# Altium PCB HVSG.PcbDoc
Units mm, origin at the board's own origin, x right, y up, seen from the top; angles counter-clockwise.
Board outline 169.29 x 39.62 mm, 2 copper layers (Top Layer, Bottom Layer), stack 1.671 mm thick; 30 components, 44 nets, 136 pads, 59 vias.
Unrouted connection lines stored in the file: 1.
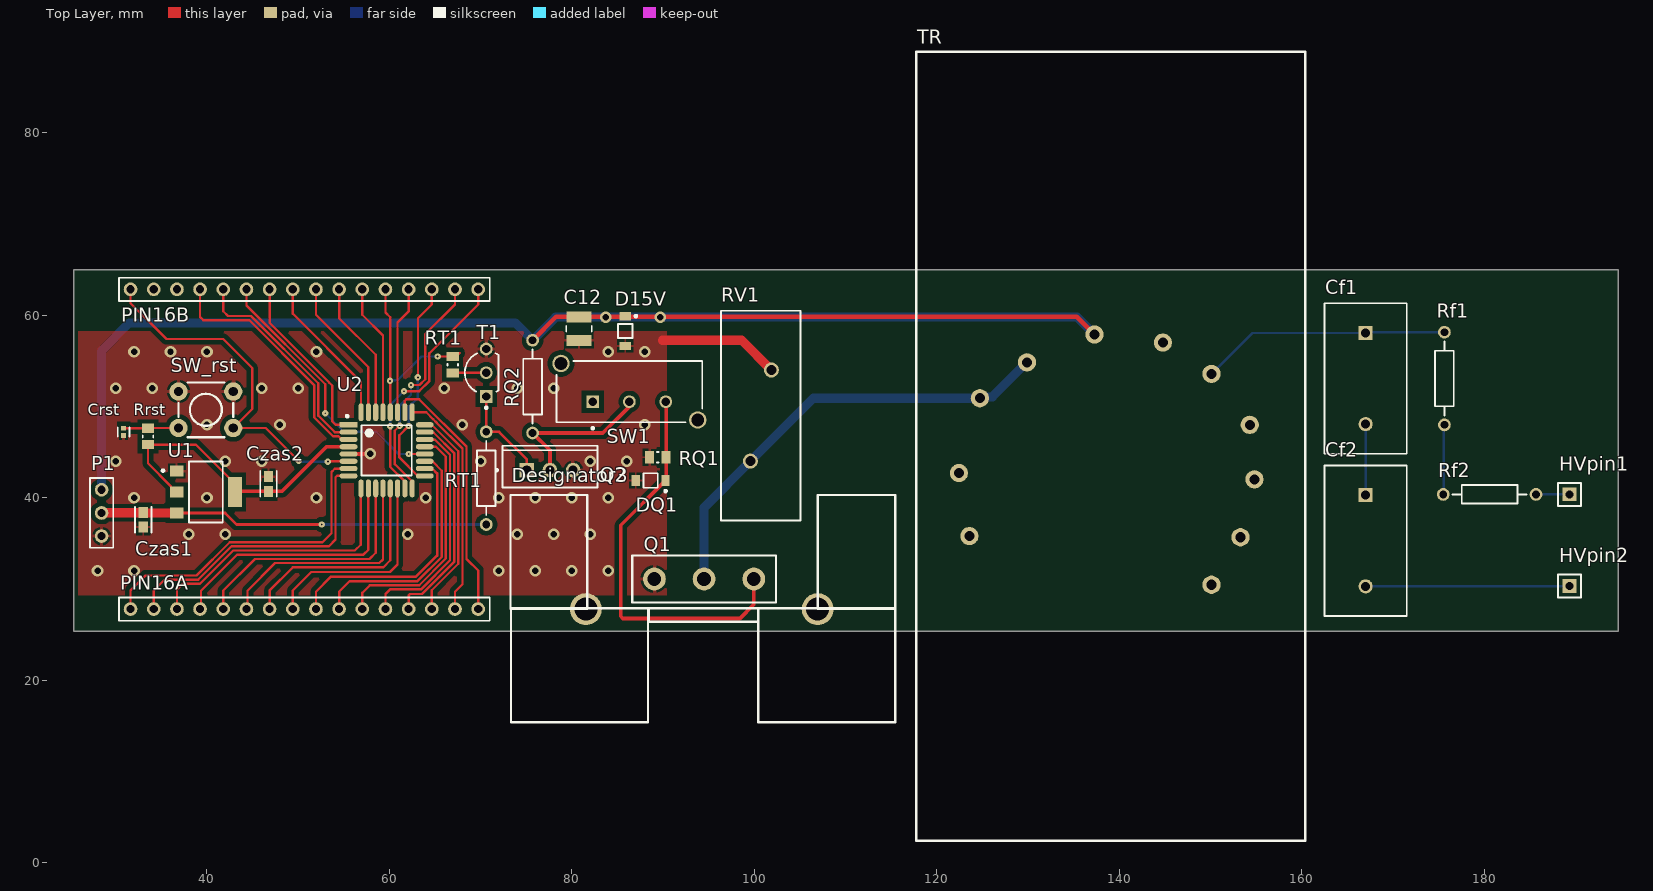
[diagram p0: Top Layer view]
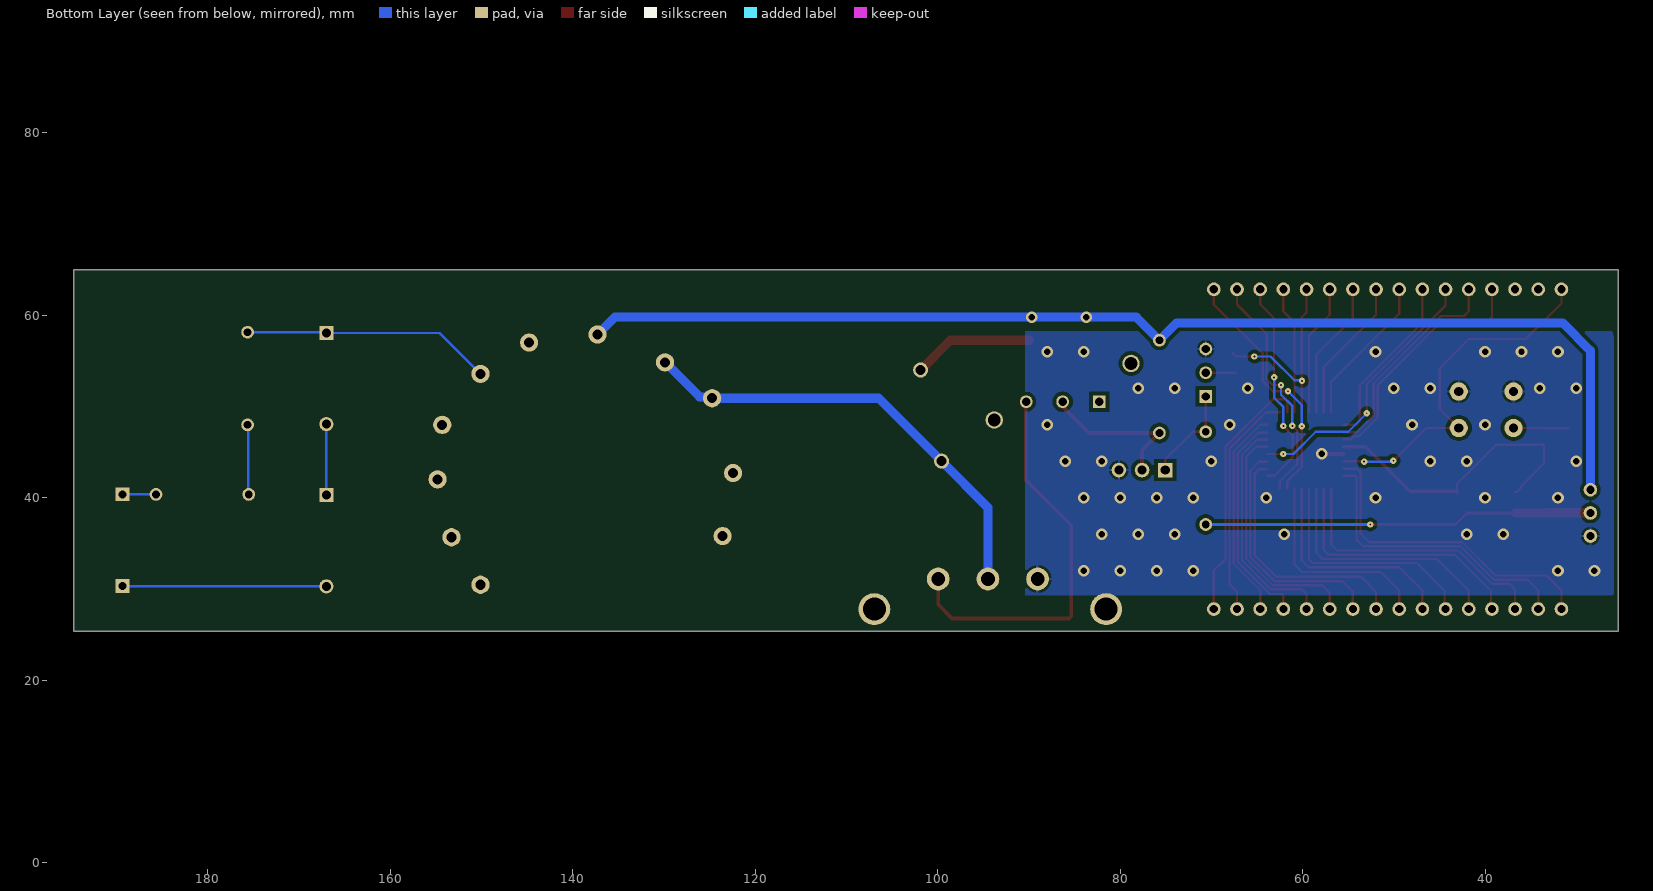
[diagram p1: Bottom Layer view, seen from below]
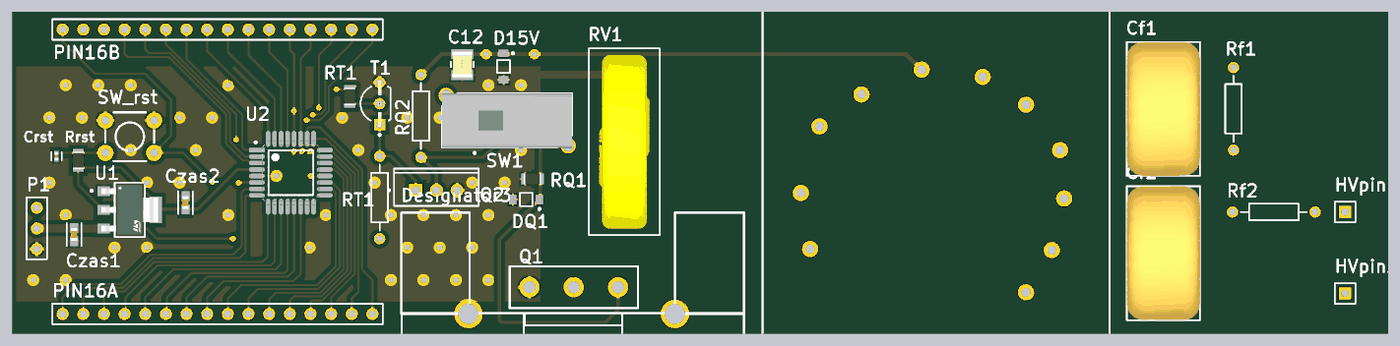
[diagram p2: 3D render of the assembled board from above, using the file's embedded part models]

## Layer stack, top to bottom
Top Solder: solder mask 0.0102, Solder Resist, Dk 3.5
Top Layer: signal copper 0.0356
Dielectric 1: dielectric 1.6, FR-4, Dk 4.8
Bottom Layer: signal copper 0.0356
Bottom Solder: solder mask 0.0102, Solder Resist, Dk 3.5

## Board outline
25.4,25.4 194.691,25.4 194.691,65.024 25.4,65.024

## Design rules (kind name [scope] priority, off if disabled: settings)
Clearance Clearance_3 [InNamedPolygon('GND_L02_P000')] p1: gap=0.4 ignorepadtopadclearanceinfootprint=FALSE
Clearance Clearance_2 [InNamedPolygon('GND_L01_P001')] p2: gap=0.5 ignorepadtopadclearanceinfootprint=FALSE
Clearance Clearance_1 [InNamedPolygon('GND_L01_P001')] p3: gap=0.5 ignorepadtopadclearanceinfootprint=FALSE
Clearance [All] p4: gap=0.2 ignorepadtopadclearanceinfootprint=FALSE
Height [All] p1: minheight=0 maxheight=50 prefheight=12.7
PolygonConnect PolygonConnect_7 [All vs IsNamedPolygon('GND_L01_P001')] p1: thpad.connectstyle=Relief thpad.reliefconductorwidth=0.4 thpad.reliefentries=4 thpad.polygonreliefangle="90 Angle" thpad.airgapwidth=0.254 smdpad.connectstyle=Relief smdpad.reliefconductorwidth=0.254 smdpad.reliefentries=4 smdpad.polygonreliefangle="90 Angle" smdpad.airgapwidth=0.254 via.connectstyle=Direct via.reliefconductorwidth=0.254 via.reliefentries=4 via.polygonreliefangle="90 Angle" via.airgapwidth=0.254
PolygonConnect PolygonConnect_6 [All vs IsNamedPolygon('GND_L01_P001')] p2: thpad.connectstyle=Relief thpad.reliefconductorwidth=0.4 thpad.reliefentries=4 thpad.polygonreliefangle="90 Angle" thpad.airgapwidth=0.254 smdpad.connectstyle=Relief smdpad.reliefconductorwidth=0.254 smdpad.reliefentries=4 smdpad.polygonreliefangle="90 Angle" smdpad.airgapwidth=0.254 via.connectstyle=Relief via.reliefconductorwidth=0.254 via.reliefentries=4 via.polygonreliefangle="90 Angle" via.airgapwidth=0.254
PolygonConnect PolygonConnect_5 [All vs IsNamedPolygon('GND_L02_P000')] p3: thpad.connectstyle=Relief thpad.reliefconductorwidth=0.254 thpad.reliefentries=4 thpad.polygonreliefangle="90 Angle" thpad.airgapwidth=0.254 smdpad.connectstyle=Relief smdpad.reliefconductorwidth=0.254 smdpad.reliefentries=4 smdpad.polygonreliefangle="90 Angle" smdpad.airgapwidth=0.254 via.connectstyle=Direct via.reliefconductorwidth=0.254 via.reliefentries=4 via.polygonreliefangle="90 Angle" via.airgapwidth=0.254
PolygonConnect PolygonConnect_4 [All vs IsNamedPolygon('GND_L01_P001')] p4: thpad.connectstyle=Relief thpad.reliefconductorwidth=0.254 thpad.reliefentries=4 thpad.polygonreliefangle="90 Angle" thpad.airgapwidth=0.254 smdpad.connectstyle=Relief smdpad.reliefconductorwidth=0.254 smdpad.reliefentries=4 smdpad.polygonreliefangle="90 Angle" smdpad.airgapwidth=0.254 via.connectstyle=Direct via.reliefconductorwidth=0.254 via.reliefentries=4 via.polygonreliefangle="90 Angle" via.airgapwidth=0.254
PolygonConnect PolygonConnect_3 [All vs IsNamedPolygon('GND_L01_P001')] p5: thpad.connectstyle=Relief thpad.reliefconductorwidth=0.254 thpad.reliefentries=4 thpad.polygonreliefangle="90 Angle" thpad.airgapwidth=0.254 smdpad.connectstyle=Direct smdpad.reliefconductorwidth=0.254 smdpad.reliefentries=4 smdpad.polygonreliefangle="90 Angle" smdpad.airgapwidth=0.254 via.connectstyle=Relief via.reliefconductorwidth=0.254 via.reliefentries=4 via.polygonreliefangle="90 Angle" via.airgapwidth=0.254
PolygonConnect PolygonConnect_2 [All vs IsNamedPolygon('GND_L01_P001')] p6: thpad.connectstyle=Relief thpad.reliefconductorwidth=0.254 thpad.reliefentries=4 thpad.polygonreliefangle="90 Angle" thpad.airgapwidth=0.254 smdpad.connectstyle=Relief smdpad.reliefconductorwidth=0.254 smdpad.reliefentries=4 smdpad.polygonreliefangle="90 Angle" smdpad.airgapwidth=0.254 via.connectstyle=Direct via.reliefconductorwidth=0.254 via.reliefentries=4 via.polygonreliefangle="90 Angle" via.airgapwidth=0.254
PolygonConnect PolygonConnect_1 [All vs IsNamedPolygon('GND_L01_P001')] p7: thpad.connectstyle=Relief thpad.reliefconductorwidth=0.254 thpad.reliefentries=4 thpad.polygonreliefangle="90 Angle" thpad.airgapwidth=0.254 smdpad.connectstyle=Relief smdpad.reliefconductorwidth=0.254 smdpad.reliefentries=4 smdpad.polygonreliefangle="90 Angle" smdpad.airgapwidth=0.254 via.connectstyle=Direct via.reliefconductorwidth=0.254 via.reliefentries=4 via.polygonreliefangle="90 Angle" via.airgapwidth=0.254
PolygonConnect [All] p8: connectstyle=Relief reliefconductorwidth=0.254 reliefentries=4 polygonreliefangle="90 Angle" airgapwidth=0.254
RoutingVias [All] p1: holewidth=0.711 width=1.27 viastyle="Through Hole" minholewidth=0.711 minwidth=1.27 maxholewidth=2 maxwidth=4
SolderMaskExpansion [All] p1: expansion=0.102 istentingtop=FALSE
SupplyNets "Schematic Supply Nets_1" [InNet('GND')] p1: voltage=0.000
SupplyNets "Schematic Supply Nets" [InNet('GND2')] p2: voltage=0.000
Width "Schematic Width Constraint_5" [InNet('NetQ1_2')] p1: maxlimit=1 minlimit=0.254 preferedwidth=0.254
Width "Schematic Width Constraint_3" [InNet('5V')] p2: maxlimit=1 minlimit=0.254 preferedwidth=1 bottomlayer_prefwidth=0.254 minimp=50.000000 maximp=50.000000 favimp=50.000000
Width "Schematic Width Constraint_2" [InNet('GND')] p3: maxlimit=2 minlimit=0.254 preferedwidth=0.254 minimp=50.000000 maximp=50.000000 favimp=50.000000
Width "Schematic Width Constraint_1" [InNet('12V')] p4: maxlimit=1 minlimit=0.254 preferedwidth=0.254
Width "Schematic Width Constraint" [InNet('3V')] p5: maxlimit=0.5 minlimit=0.254 preferedwidth=0.254 bottomlayer_maxwidth=0.254 minimp=50.000000 maximp=50.000000 favimp=50.000000
Width [All] p6: maxlimit=0.41 minlimit=0.254 preferedwidth=0.254
29 further rules are at their usual default settings.

## Classes and differential pairs
component class Sheet1: C12 Cf1 Cf2 Crst Czas1 Czas2 D15V DQ1 HVpin1 HVpin2 p1 PIN16A PIN16B Q1 Q2 Rf1 Rf2 RQ1 RQ2 Rrst RT1 RV1 SW1 SW_rst T1 TR U1 U2

## Components (designator, comment, footprint, x,y, rotation, side; value= is the part's Value field where it differs from the comment)
C12 "C1210C107M4PACTU" FP-C1210C-FS-MFG 80.772,58.547 r270 top
Cf1 "ECKD4A102MDU" FP-ECKD4A102MDU-MFG 167.005,53.086 r270 top
Cf2 "ECKD4A102MDU" FP-ECKD4A102MDU-MFG 167.005,35.306 r270 top
Crst "C0402C104K8PACTU" FP-C0402-BB-MFG 30.861,47.244 r270 top value="0.10 μF"
Czas1 "GRM188R60J106ME47D" FP-GRM188-0_1-e0_2_0_55-IPC_A 33.02,37.592 r270 top (schematic designator Czas?)
Czas2 "GRM188R60J106ME47D" FP-GRM188-0_1-e0_2_0_55-IPC_A 46.736,41.529 r90 top
D15V "MMSZ4702T1G" ONSC-SOD-123-2-425-04_V 85.852,58.293 r270 top
Designator3 "Comment" heatsink 106.934,27.813 r180 top
DQ1 "MMSZ4702T1G" ONSC-SOD-123-2-425-04_V 88.63,41.91 r180 top
HVpin1 "GOLDPIN_1" HDR1X1 189.357,40.386 r90 top
HVpin2 "GOLDPIN_1" HDR1X1 189.357,30.353 r90 top
P1 "pin3" pin3 28.448,38.354 r270 top (schematic designator p1)
PIN16A "pin16" pin16 51.943,27.813 r0 top
PIN16B "pin16" pin16 51.943,62.865 r0 top
Q1 "NMOS_STW11NM80" "NMOS_ STW11NM80" 94.488,31.115 r180 top
Q2 "IPP045N10N3 G" INF-PG-TO220-3-1_A_V 77.597,43.053 r90 top
Rf1 "RES_AX_1/4W_4M" AX_1/4W_4M 175.641,48.006 r90 top value=1M
Rf2 "RES_AX_1/4W_4M" AX_1/4W_4M 185.674,40.386 r180 top value=1M
RQ1 "100k" RESC2013X60X35NL10T20 89.419,44.45 r180 top (schematic designator RQ?)
RQ2 "RES_AX_1/4W_4M" AX_1/4W_4M 75.692,47.117 r90 top value=1K
Rrst "10k" RESC2013X60X35NL10T20 33.528,46.736 r270 top
RT1 "RES_AX_1/4W_4M" AX_1/4W_4M 70.612,47.244 r270 top value=1K
RT1 "10k" RESC2013X60X35NL10T20 66.929,54.61 r90 top (schematic designator Rster)
RV1 "820524211B" D23W8.7H27P2.3 100.711,49.022 r270 top
SW1 "1825255-1" TECO-1825255-1_V 86.296,51.646 r0 top
SW_rst "SWITCH_SQ_6m_4X6m" SQ_6m_4X6m 39.878,49.657 r270 top
T1 "BC548" TO-92W 70.612,51.121 r90 top
TR "trafopowielacz" trafopowielacz 123.571,35.814 r0 top
U1 "LD1117S33CTR" FP-SOT-223-0046067_14-MFG 39.878,40.64 r0 top
U2 "STM32G030K8T6" FP-LQFP32-5V-IPC_A 59.69,45.212 r0 top

## Footprints (in the part's own frame and the unit in brackets; to place one, negate y for a bottom-side part, rotate by r counter-clockwise, add the part's x,y. Pads: shape width x height; smd on the part's side, far side on the other; paste and mask are expansions set on the pad)
AX_1/4W_4M [mm] "Axial Device, Thru-Hole; 2 Leads; 0.4 in Pin Spacing"
  round 1.4 hole 0.85: 1(0,0) 2(10.16,0)
  silkscreen extent 1.02,-1.02 9.14,1.02
D23W8.7H27P2.3 [mm] "Disk Varistor, Diameter 23mm, Width 8.7mm"
  round 1.65 hole 1.1: 1(-5,1.15) 2(5,-1.15)
  silkscreen extent -11.5,-4.35 11.5,4.35, body extent -10.69,-3.1 10.69,3.1, height 24
FP-C0402-BB-MFG [mm]
  rect 0.52x0.52 smd paste+0 mask+0: 1(-0.4,0) 2(0.4,0)
  silkscreen extent -0.5,-0.64 0.5,0.64, body extent -0.8,-0.4 0.8,0.4, height 0.25
FP-C1210C-FS-MFG [mm]
  rect 1.2x2.7 smd paste+0 mask+0: 1(-1.3,0) 2(1.3,0)
  silkscreen extent -0.33,-1.4 0.33,1.4, body extent -2,-1.5 2,1.5, height 0.25
FP-ECKD4A102MDU-MFG [mm]
  rect 1.55x1.55 hole 1 paste-2539.97 mask+0: 1(-5,0)
  round 1.55 hole 1 paste-2539.97 mask+0: 2(5,0)
  silkscreen extent -8.25,-4.5 8.25,4.5, body extent -8.35,-4.6 8.35,4.6, height 0.25
FP-GRM188-0_1-e0_2_0_55-IPC_A [mm]
  rect 1.208x1.012 smd paste+0 mask+0: 1(-0.802,0) 2(0.802,0)
  silkscreen extent -1.41,-0.91 1.41,0.91, body extent -1.91,-1.01 1.91,1.01, height 0.25
FP-LQFP32-5V-IPC_A [mm]
  rect 1.955x0.566 smd paste+0 mask+0: 1(-4.175,2.8)
  rrect100% 1.955x0.566 smd paste+0 mask+0: 2(-4.175,2) 3(-4.175,1.2) 4(-4.175,0.4) 5(-4.175,-0.4) 6(-4.175,-1.2) 7(-4.175,-2) 8(-4.175,-2.8) 17(4.175,-2.8) 18(4.175,-2) 19(4.175,-1.2) 20(4.175,-0.4) 21(4.175,0.4) 22(4.175,1.2) 23(4.175,2) 24(4.175,2.8)
  rrect100% 0.566x1.955 smd paste+0 mask+0: 9(-2.8,-4.175) 10(-2,-4.175) 11(-1.2,-4.175) 12(-0.4,-4.175) 13(0.4,-4.175) 14(1.2,-4.175) 15(2,-4.175) 16(2.8,-4.175) 25(2.8,4.175) 26(2,4.175) 27(1.2,4.175) 28(0.4,4.175) 29(-0.4,4.175) 30(-1.2,4.175) 31(-2,4.175) 32(-2.8,4.175)
  silkscreen extent -4.45,-2.75 2.75,3.87, body extent -5.65,-5.65 5.65,5.65, height 0.25
FP-SOT-223-0046067_14-MFG [mm]
  rect 1.5x1.2 smd paste+0 mask+0: 1(-3.2,2.3) 2(-3.2,0) 3(-3.2,-2.3)
  rect 1.5x3.3 smd paste+0 mask+0: 4(3.2,0)
  silkscreen extent -4.82,-3.35 1.85,3.35, body extent -4.05,-3.45 4.05,3.45, height 0.25
HDR1X1 [mm] "Connector; Header; 1Position"
  rect 1.5x1.5 hole 0.9: 1(0,0)
  silkscreen extent -1.27,-1.27 1.25,1.27
heatsink [mm]
  round 3.5 hole 2.5: 0(0,0) 1(25.4,0)
  silkscreen extent -8.5,-12.5 33.66,12.4
INF-PG-TO220-3-1_A_V [mm] "FM, 3-Leads, Body 10.03x8.98mm, Pitch 2.54mm"
  rect 1.6x1.6 hole 1: 1(0,2.54)
  round 1.6 hole 1: 2(0,0) 3(0,-2.54)
  silkscreen extent -1.93,-5.2 2.67,5.97, body extent -1.93,-5.2 2.67,5.2, height 20.75
"NMOS_ STW11NM80" [mm]
  round 2.5 hole 1.5: 1(-5.45,0) 2(0,0) 3(5.45,0)
  silkscreen extent -7.87,-2.57 7.88,2.58
ONSC-SOD-123-2-425-04_V [mm] "SOD, 2-Leads, Body 2.69x1.6mm"
  rect 0.91x1.22 smd: 1(-1.635,0) 2(1.635,0)
  silkscreen extent -1.76,-0.8 0.78,1.29, body extent -1.35,-0.8 1.35,0.8, height 1.35
pin3 [mm]
  round 1.5 hole 0.9: 0(-2.54,0) 1(0,0) 2(2.54,0)
  silkscreen extent -3.81,-1.27 3.81,1.27
pin16 [mm]
  round 1.5 hole 0.9: 0(-20.32,0) 1(-17.78,0) 2(-15.24,0) 3(-12.7,0) 4(-10.16,0) 5(-7.62,0) 6(-5.08,0) 7(-2.54,0) 8(0,0) 9(2.54,0) 10(5.08,0) 11(7.62,0) 12(10.16,0) 13(12.7,0) 14(15.24,0) 15(17.78,0)
  silkscreen extent -21.59,-1.27 19.05,1.27
RESC2013X60X35NL10T20 [mm] "Chip Resistor, 2-Leads, Body 2.1x1.35mm, IPC Medium Density"
  rect 1x1.35 smd: 1(-0.9,0) 2(0.9,0)
  silkscreen extent -0.1,-0.58 0.1,0.58, body extent -1.05,-0.68 1.05,0.67, height 0.6
SQ_6m_4X6m [mm]
  round 2 hole 1 paste-2539.97: 1(-2,3) 2(-2,-3) 3(2,-3) 4(2,3)
  silkscreen extent -3,-3 3,3
TECO-1825255-1_V [mm] "THD, 5-Leads, Body 6.7x16mm, Pitch 4mm"
  rect 1.4x1.4 hole 0.9: 1(-4,-1.1)
  round 1.4 hole 0.9: 2(0,-1.1) 3(4,-1.1)
  round 1.9 hole 1.4: MH1(-7.5,3.1) MH2(7.5,-3.1)
  silkscreen extent -8,-4.12 8,3.35, body extent -8,-3.35 8,3.35, height 12
TO-92W [mm] "TO, 3-Leads, Body Dia 4.7mm, Pitch 2.6mm"
  rect 1.4x1.4 hole 0.9: 1(0,0)
  round 1.4 hole 0.9: 2(2.6,0) 3(5.2,0)
  silkscreen extent -1.37,-1.34 4.73,2.35, body extent -0.24,-1.34 5.44,2.35, height 5.33
trafopowielacz [mm] "Sony Focus HDK 765-51 IB2655"
  round 2 hole 1.1: 1(0,0) 2(-1.148,6.909) 3(1.143,15.113) 4(6.309,19.047) 5(13.716,22.098) 6(21.21,21.21) 7(26.543,17.78) 8(30.734,12.192) 9(31.242,6.223) 10(29.718,-0.127) 11(26.543,-5.334)
  silkscreen extent -5.84,-33.4 36.83,53.09

## Part data
C12: library part CMP-03020-034653-1, "CAP CER 100UF 16V X5R 1210", Capacitance=100uF, Case Code (Imperial)=1210, Case Code (Metric)=3225, Dielectric=X5R, Dielectric Material=Ceramic, Max Operating Temperature=85°C, Min Operating Temperature=-55°C, Package Quantity=1000, Tolerance=20%, Voltage Rating=16V, Case/Package=1210, Depth=2.5mm, Lead Free="Lead Free", Length=3.2mm, Packaging="Tape and Reel", REACH SVHC="No SVHC", Termination=SMD/SMT, Thickness=0.106inch, Voltage Rating (DC)=16V, Weight=0.000564oz, Width=0.098inch
Cf1 Cf2: library part CMP-05432-000001-1, "High Voltage Ceramic Disc Capacitors, Rated 4 to 15 kVDC, Temp. Char. Y5T, 1.0NF 10000V", Capacitance=1nF, Case/Package=Radial, Dielectric=Y5T, Dielectric Material=Ceramic, Insulation Resistance=10GR, Max Operating Temperature=85°C, Min Operating Temperature=-25°C, Tolerance=20%, Voltage Rating=10kV, Lead Length=20mm, Lead Pitch=10mm, Reach SVHC Compliant=Yes, RoHS Compliant=Yes
Crst: library part CMP-2008-02046-2, "CAP CER 0.1UF 10V X5R 0402", Capacitance="0.10 μF", Manufacturer=Kemet, Package=C0402-BB, Temperature="-55°C to +125°C", Temperature Characteristic=X5R, Temperature Coefficient=15%, Temperature Range High=+125°C, Temperature Range Low=-55°C, Tolerance=0.1, Voltage Rating="10 V", Automotive=No, Category=Cap, ComponentLink2Description=Datasheet, ComponentLink2URL=https://content.kemet.com/datasheets/KEM_C1002_X7R_SMD.pdf, Device Class L1="Passive Components", Device Class L2=Capacitors, Device Class L3="Ceramic Capacitors", Digikey Description="CAP CER 0.1UF 10V X5R 0402", Height=0.55mm, Ipc Land Pattern Name=CAPC10050X50, Lead Free=Yes, Manufacturer Part Number=C0402C104K8PACTU, Material=Ceramic, Mouser Description="Capacitor 100 nF 10 VDC 0402", Octopart=https://octopart.com/c0402c104k8pactu-kemet-140039, RoHS=TRUE
Czas1 Czas2: library part CMP-2006-02792-2, "Chip Multilayer Ceramic Capacitors for General Purpose, 0603, 10uF, X5R, 15%, 20%, 6.3V", Capacitance=10uF, Case Code (Imperial)=0603, Case Code (Metric)=1608, Dielectric=X5R, Max Operating Temperature=85°C, Min Operating Temperature=-55°C, Package Quantity=4000, Tolerance=20%, Voltage=6.3V, Case/Package=0603, Depth=0.8mm, Height=0.8mm, Lead Free="Lead Free", Length=1.6mm, Material=Ceramic, Mount="Surface Mount", Packaging="Tape and Reel", Radiation Hardening=No, REACH SVHC="No SVHC", Termination=SMD/SMT, Thickness=0.035inch, Voltage Rating=6.3V, Voltage Rating (DC)=6.3V, Width=0.031inch
D15V DQ1: library part CMP-1060-00296-1, "Zener Voltage Regulator, 500 mW, 2-Pin SOD-123, Pb-Free, Tape and Reel", Manufacturer="On Semiconductor", ComponentLink1Description="Manufacturer URL", ComponentLink1URL=http://www.onsemi.com/, ComponentLink2Description=Datasheet, ComponentLink2URL=http://www.onsemi.com/pub_link/Collateral/MMSZ4678T1-D.PDF, ComponentLink3Description="Package Specification", ComponentLink3URL=http://www.onsemi.com/pub_link/Collateral/425-04.PDF, DatasheetVersion="Rev. 9", Mounting Technology="Surface Mount", P Max (W)=0.5, PackageDescription="2-Pin SOD, Body 1.6 x 2.69 mm", PackageReference=SOD-123-2-425-04, PackageVersion="Rev. G, 10/2009", Packing="Tape and Reel", PartNumber=MMSZ4702T1G, RoHS=Pb-Free, VZ Typ (V)=15
HVpin1 HVpin2: "Header, 1-Pin", LatestRevisionDate=17-Jul-2002, LatestRevisionNote="Re-released for DXP Platform.", Publisher="Altium Limited"
Q2: library part CMP-1091-00126-1, "N-Channel OptiMOS 3 Power-Transistor, 100 V VDS, 100 A ID, -55 to 175 degC, PG-TO220-3-1, Tube, Green", Manufacturer=Infineon, ComponentLink1Description="Manufacturer URL", ComponentLink1URL=http://www.infineon.com/, ComponentLink2Description=Datasheet, ComponentLink2URL=http://www.infineon.com/dgdl/IPP045N10N3+G_Rev2.5.pdf?folderId=db3a304313b8b5a60113cee8763b02d7&fileId=db3a30431ce5fb52011d1e8b0cc31586, ComponentLink3Description="Package Specification", ComponentLink3URL=http://www.infineon.com/dgdl/IPP028N08N3_Rev1%5B1%5D.0.pdf?folderId=db3a304313b8b5a60113cee8763b02d7&fileId=db3a30432313ff5e0123a3c08e7326b5, DatasheetVersion="Rev. 2.5", Green=TRUE, Halogen-free=TRUE, ID (max)="100Â A", IDpuls (max)="400Â A", Mounting Technology="Through Hole", PackageDescription="3-Pin Plastic (Green) Transistor Single Outline Package, 10.03 x 8.98 mm Body, 2.54 mm Pitch", PackageReference=PG-TO220-3-1, PackageVersion="Rev. 05, 08/2007", Packing=Tube, PartNumber="IPP045N10N3 G", Polarity=N, Ptot (max)="214Â W", QG="88Â nC", RDS (on) (max)="4.5Â mOhm", Rth="0.7Â K/W", RthJA (max)="62 K/W", RthJC (max)="0.7Â K/W", VDS (max)="100Â V", VGS(th) (max)="3.5Â V", VGS(th) (min)="2Â V"
Rf1 Rf2 RQ2 RT1: "Resistor", LatestRevisionDate=17-Jul-2002, LatestRevisionNote="Re-released for DXP Platform.", PackageDescription="Axial Device, Thru-Hole; 2 Leads; 0.4 in Pin Spacing", PackageReference=AXIAL-0.4, Published=8-Jun-2000, Publisher="Altium Limited"
RQ1 Rrst RT1: library part CMP-1659-00013-4, "Chip Resistor, 10 KOhm, +/- 1%, 0.125 W, -55 to 155 degC, 0805 (2012 Metric), RoHS, Tape and Reel", Manufacturer=Yageo, Max Operating Temperature="155 degC", Min Operating Temperature="-55 degC", Package Quantity=5000, Voltage Rating="150 V", ComponentLink1Description="Manufacturer URL", ComponentLink1URL=http://www.yageo.com/, ComponentLink2Description=Datasheet, ComponentLink2URL=http://www.yageo.com/documents/recent/PYu-RC_Group_51_RoHS_L_04.pdf, DatasheetVersion="Rev. 4, 02/2016", Height="0.5 mm", Length="2 mm", Mount="Surface Mount", Mounting Technology="Surface Mount", PackageDescription="2-Pin Surface Mounted Device, Body 2 x 1.25 mm", PackageReference=0805, Packaging="Tape and Reel", Pins=2, REACH SVHC="No SVHC", RoHSCompliant=true
RV1: library part CMP-03913-22865219-1, "820524211B Disk Varistor Standard WE-VD - BULK", Capacitance=570pF, Clamping Current=100A, Clamping Voltage=1.12kV, Max Operating Temperature=85°C, Max Voltage Rating (AC)=420V, Max Voltage Rating (DC)=560V, Min Operating Temperature=-40°C, Varistor Voltage=680V, Diameter=23mm, Energy=344J, Height=25mm, Lead Pitch=10mm, Length=23mm, NexarPartId=22865219, REACH SVHC=Unknown, RoHS=Compliant, Thickness=6mm, Voltage Rating (AC)=420V, Voltage Rating (DC)=560V, Width=6.2mm
SW1: library part CMP-2100-03576-1, "Slide Switch, SPDT, 125 V, -20 to 85 degC, 5-Pin THD, RoHS, Tray", Case/Package=300, Current Rating=300mA, Flammability Rating=UL94HB, Manufacturer="TE Connectivity", Max Operating Temperature=85degC, Max Voltage Rating (AC)=125V, Min Operating Temperature=-20degC, Operating Force=600gf, Package Description="5-Pin Through Hole Device, Body 6.7 x 16 mm, Pitch 4 mm", Package Quantity=560, Actuator Length=4.5mm, Contact Material=Copper, Contact Plating=Silver, Contact Style=Shorting, Datasheet URL=http://www.te.com/commerce/DocumentDelivery/DDEController?Action=showdoc&DocId=Customer+Drawing%7F1825255%7FA4%7Fpdf%7FEnglish%7FENG_CD_1825255_A4_baseFilename.pdf%7F1825255-1, Datasheet Version="Rev. A4, 03/2014", Depth=6.7mm, Electrical Life=15000Cycles, ELV=Compliant, Lead Free=LeadFree, Length=16mm, Manufacturer URL=http://www.te.com/, Max Current Rating=300mA, Mount=ThroughHole, Number of Positions=2, Orientation=Vertical, Package Reference=1825255-1, Packaging=Bulk, Radiation Hardening=No, REACH SVHC=Unknown, RoHSCompliant=true, Switch Travel=4mm, Termination=PCPins, Throw Configuration=SPDT, Voltage Rating (AC)=125V
SW_rst: Contact Current Rating=50mA, Voltage Rating=12V, Actuator Length=1.5mm, Current Rating=50mA, Height=4mm, Mount="Through Hole", Switch Function=Off-Mom
T1: "Amplifier Transistor, NPN Silicon, 3-Pin TO-92, Bulk Box", Manufacturer="On Semiconductor", PartNumber=BC548B, ComponentLink1Description="Manufacturer URL", ComponentLink1URL=http://www.onsemi.com/, ComponentLink2Description=Datasheet, ComponentLink2URL=http://www.onsemi.com/pub_link/Collateral/BC546-D.PDF, ComponentLink3Description="Package Specification", ComponentLink3URL=http://www.onsemi.cn/pub_link/Collateral/2N6426-D.PDF, DatasheetVersion="Rev. 7", fT Min (MHz)=150, IC Continuous (A)=0.1, Mounting Technology="Through Hole", PackageDescription="3-Pin Transistor Outline, Body 4.825 x 3.685 mm, Pitch 1.27 mm", PackageReference=TO-92-3-29-11_AM_SL, PackageVersion="Rev. AM", Packing="Bulk Box", Polarity=NPN, RoHS=FALSE
U1: library part CMP-0244-00307-2, "IC REG LINEAR 3.3V 800MA SOT223", Case/Package=SOT-223, Dropout Voltage=1.1V, Input Bias Current=5mA, Max Input Voltage=15V, Max Operating Temperature=125°C, Max Output Current=1.3A, Max Output Voltage=3.3V, Max Power Dissipation=12W, Min Input Voltage=5.3V, Min Operating Temperature=-40°C, Output Current=950mA, Output Voltage Accuracy=1%, Package Quantity=1, Quiescent Current=10mA, Accuracy=1%, Contact Plating=Tin, Height=1.8mm, Lead Free="Lead Free", Length=6.5mm, Max Supply Voltage=15V, Min Output Voltage=3.3V, Min Supply Voltage=3.3V, Mount="Surface Mount", Nominal Output Voltage=3.3V, Number of Outputs=1, Number of Pins=4, Number of Regulators=1, Number of Terminals=4, Output Type=Fixed, Output Voltage=3.3V, Packaging="Tape and Reel", Polarity=Positive, Power Dissipation=12W, Radiation Hardening=No, REACH SVHC="No SVHC", Termination=SMD/SMT, Weight=0.01lb, Width=3.5mm
U2: library part CMP-12105-000136-1, "IC MCU 32BIT 64KB FLASH 32LQFP", RoHS Compliant=Yes

## Via types
v1: diameter 1.27, hole 0.711, Top Layer to Bottom Layer, 46 vias
v2: diameter 0.7, hole 0.2, Top Layer to Bottom Layer, 13 vias

## Nets (pads, with @x,y where several pads share a name; then routed paths per layer and width w, separated by ;. In a path a pad name is that pad's centre, name@x,y a point inside that pad or via, vN(x,y) a via of type N, cw(c..) or ccw(c..) an arc to the next point about the centre after c; other vN are vias at no path point)
3V: Czas2.1 Rrst.2 U1.2 U1.4 U2.4 | length 33.3
  Top Layer w0.254: U1.2 36.528,40.64 36.055,41.113 36.055,41.263 33.528,43.79 Rrst.2 38.782,45.836 43.078,41.54 U1.4
  Top Layer w0.4: U1.4 43.165,40.727 Czas2.1 48.22,40.727 53.105,45.612 U2.4
5V: Czas1.1 P1.1 RT1.2@70.612,37.084 U1.3 | length 42.7
  Top Layer w0.3: U1.3 41.988,38.34 43.244,37.084 v2(52.578,37.084)
  Top Layer w1: P1.1 28.468,38.374 33.014,38.374 33.02,38.38 Czas1.1 ; Czas1.1@33.026,38.34 U1.3
  Bottom Layer w0.3: v2(52.578,37.084) RT1.2@70.612,37.084
12V: C12.1 D15V.1 P1.0 RQ2.2 TR.5 | length 191.8
  Top Layer w0.5: RQ2.2 78.262,59.847 C12.1 85.852,59.847 135.352,59.847 TR.5@137.424,57.775
  Bottom Layer w1: P1.0 28.448,56.134 31.496,59.182 73.787,59.182 RQ2.2 78.232,59.817 135.382,59.817 TR.5@137.414,57.785
  other v1: 83.693,59.817 89.662,59.817
GND: C12.2 Crst.2 Czas1.2 Czas2.2 D15V.2 DQ1.2 P1.2 Q1.3 Q2.3 RQ1.2 RV1.1 SW_rst.1 SW_rst.2 T1.3 U1.1 U2.5 | length 15.7
  Top Layer w0.254: v1@57.893,44.812 v1(57.912,44.831)
  Top Layer w0.4: U2.5 v1@57.893,44.812
  Top Layer w1: 89.916,57.277 98.606,57.277 RV1.1
  other v1: 28,32 32,32 72,32 76,32 80,32 84,32 38,36 42,36 62,36 74,36 78,36 82,36 32,40 40,40 52,40 64,40 72,40 76,40 80,40 84,40 30,44 42,44 46,44 70,44 82,44 86,44 40,48 48,48 68,48 88,48 30,52 34,52 46,52 50,52 66,52 74,52 78,52 32,56 36,56 40,56 52,56 84,56 88,56
GND2: Cf1.1 Rf1.2 TR.7 | length 27.4
  Bottom Layer w0.254: TR.7 154.606,58.086 Cf1.1 167.085,58.166 Rf1.2
NetCf1_2: Cf1.2 Cf2.1 | length 7.8
  Bottom Layer w0.254: Cf2.1 Cf1.2
NetCf2_2: Cf2.2 HVpin2.1 | length 22.4
  Bottom Layer w0.254: Cf2.2 189.31,30.306 HVpin2.1
NetDQ1_1: DQ1.1 Q1.1 RQ1.1 SW1.3 | length 43.2
  Top Layer w0.4: DQ1.1 85.354,36.999 85.354,27.021 85.589,26.787 98.415,26.787 99.938,28.31 Q1.1 ; DQ1.1@90.36,41.91 90.36,44.45 SW1.3@90.36,50.081
NetHVpin1_1: HVpin1.1 Rf2.1 | length 3.7
  Bottom Layer w0.254: Rf2.1 HVpin1.1
NetPIN16A_0: PIN16A.0 U2.7 | length 35.4
  Top Layer w0.254: PIN16A.0 31.623,29.845 33.274,31.496 38.855,31.496 42.503,35.144 52.67,35.144 53.642,36.116 53.642,42.847 54,43.205 55.508,43.205 U2.7
NetPIN16A_1: PIN16A.1 U2.8 | length 32.6
  Top Layer w0.254: PIN16A.1 34.163,29.845 35.36,31.042 39.043,31.042 42.691,34.69 53.359,34.69 54.096,35.427 54.096,42.263 54.245,42.412 U2.8
NetPIN16A_2: PIN16A.2 U2.9 | length 30.5
  Top Layer w0.254: PIN16A.2 36.703,29.972 37.319,30.588 39.231,30.588 42.879,34.236 56.207,34.236 56.846,34.875 56.846,40.992 U2.9
NetPIN16A_3: PIN16A.3 U2.10 | length 29
  Top Layer w0.254: PIN16A.3 39.351,27.921 39.351,29.826 43.307,33.782 57.15,33.782 57.69,34.322 U2.10
NetPIN16A_4: PIN16A.4 U2.11 | length 27.5
  Top Layer w0.254: PIN16A.4 41.783,29.845 45.249,33.311 57.822,33.311 58.49,33.979 U2.11
NetPIN16A_5: PIN16A.5 U2.12 | length 26.1
  Top Layer w0.254: PIN16A.5 44.438,27.928 44.438,29.833 47.462,32.857 58.892,32.857 59.29,33.255 U2.12
NetPIN16A_6: PIN16A.6 U2.13 | length 24.5
  Top Layer w0.254: PIN16A.6 46.863,29.845 49.403,32.385 59.309,32.385 60.09,33.166 U2.13
NetPIN16A_7: PIN16A.7 U2.14 | length 23
  Top Layer w0.254: PIN16A.7 49.403,29.845 51.435,31.877 60.071,31.877 60.89,32.696 U2.14
NetPIN16A_8: PIN16A.8 U2.18 | length 27.4
  Top Layer w0.254: PIN16A.8 51.943,29.718 53.594,31.369 62.919,31.369 65.224,33.674 65.224,42.687 64.759,43.152 63.925,43.152 U2.18
NetPIN16A_9: PIN16A.9 U2.19 | length 26.5
  Top Layer w0.254: PIN16A.9 54.483,29.718 55.645,30.88 63.072,30.88 65.729,33.537 65.729,42.982 64.759,43.952 63.925,43.952 U2.19
NetPIN16A_10: PIN16A.10 U2.21 | length 26.4
  Top Layer w0.254: PIN16A.10 57.023,29.591 57.858,30.426 63.26,30.426 66.183,33.349 66.183,44.533 65.104,45.612 U2.21
NetPIN16A_11: PIN16A.11 U2.22 | length 25.3
  Top Layer w0.254: PIN16A.11 59.563,29.464 60.071,29.972 63.448,29.972 66.637,33.161 66.637,44.721 65.292,46.066 64.968,46.389 63.888,46.389 U2.22
NetPIN16A_12: PIN16A.12 U2.23 | length 24.1
  Top Layer w0.254: PIN16A.12 62.103,29.315 62.252,29.464 63.582,29.464 67.091,32.973 67.091,44.916 64.855,47.152 63.925,47.152 U2.23
NetPIN16A_13: PIN16A.13 U2.24 | length 23.4
  Top Layer w0.254: U2.24 64.637,48.012 67.545,45.104 67.545,32.785 64.643,29.883 PIN16A.13
NetPIN16A_14: PIN16A.14 U2.25 | length 25.1
  Top Layer w0.254: U2.25 64.024,49.387 64.789,48.622 64.813,48.622 65.17,48.265 65.17,48.241 67.999,45.412 67.999,30.534 67.183,29.718 PIN16A.14
NetPIN16A_15: PIN16A.15 U2.26 | length 28.6
  Top Layer w0.254: U2.26 61.69,50.641 61.849,50.8 63.277,50.8 68.453,45.624 68.453,33.314 69.723,32.044 PIN16A.15
NetPIN16B_3: PIN16B.3 U2.3 | length 26.9
  Top Layer w0.254: PIN16B.3 39.243,59.839 39.592,59.49 44.636,59.49 51.743,52.383 51.743,48.834 53.819,46.758 54.411,46.758 54.757,46.412 U2.3
NetPIN16B_4: PIN16B.4 U2.2 | length 23.7
  Top Layer w0.254: PIN16B.4 41.783,60.452 42.291,59.944 44.824,59.944 52.197,52.571 52.197,49.022 54.007,47.212 U2.2
NetPIN16B_5: PIN16B.5 U2.20 | length 29.9
  Top Layer w0.254: PIN16B.5 44.323,61.087 52.959,52.451 v2(52.959,49.276) ; v2@62.103,44.831 v2(62.122,44.812) U2.20
  Bottom Layer w0.254: v2(52.959,49.276) 54.991,47.244 58.547,47.244 60.979,44.812 v2(62.122,44.812)
NetPIN16B_6: PIN16B.6 U2.1 | length 19.3
  Top Layer w0.254: PIN16B.6 46.863,59.189 53.413,52.639 53.413,52.632 53.721,52.324 53.721,48.387 54.096,48.012 U2.1
NetPIN16B_7: PIN16B.7 U2.32 | length 16.6
  Top Layer w0.254: PIN16B.7 49.403,60.198 56.89,52.711 U2.32
NetPIN16B_8: PIN16B.8 U2.31 | length 15.9
  Top Layer w0.254: PIN16B.8 51.943,60.071 57.69,54.324 U2.31
NetPIN16B_9: PIN16B.9 U2.30 | length 15.1
  Top Layer w0.254: PIN16B.9 54.483,59.69 58.49,55.683 U2.30
NetPIN16B_10: PIN16B.10 U2.29 | length 14.4
  Top Layer w0.254: PIN16B.10 57.023,60.071 59.29,57.804 U2.29
NetPIN16B_12: PIN16B.12 U2.27 | length 14
  Top Layer w0.254: U2.27 60.89,59.226 62.103,60.439 PIN16B.12
NetPIN16B_13: PIN16B.13 U2.17 | length 23.5
  Top Layer w0.254: v2(62.103,47.879) 61.087,46.863 61.087,44.433 63.108,42.412 U2.17 ; v2(63.119,53.213) 63.128,53.222 63.128,59.699 64.643,61.214 PIN16B.13
  Bottom Layer w0.254: v2(62.103,47.879) 62.103,49.971 63.119,50.987 v2(63.119,53.213)
NetPIN16B_14: PIN16B.14 U2.16 | length 25.9
  Top Layer w0.254: v2(61.113,47.89) 60.579,47.356 60.579,43.705 62.49,41.794 U2.16 ; v2(62.357,52.366) 63.288,52.366 63.923,53.001 63.923,57.954 67.183,61.214 PIN16B.14
  Bottom Layer w0.254: v2(61.113,47.89) 61.113,50.064 62.357,51.308 v2(62.357,52.366)
NetPIN16B_15: PIN16B.15 U2.15 | length 27.5
  Top Layer w0.254: v2(60.071,47.86) 60.071,43.413 61.69,41.794 U2.15 ; v2(61.595,51.689) 63.253,51.689 64.377,52.813 64.377,55.868 69.723,61.214 PIN16B.15
  Bottom Layer w0.254: v2(60.071,47.86) 60.071,50.165 v2(61.595,51.689)
NetQ1_2: Q1.2 RV1.2 TR.3 TR.4 | length 49.8
  Bottom Layer w1: Q1.2 94.488,38.949 RV1.2 106.466,50.927 TR.3 124.862,51.075 126.095,51.075 TR.4
NetQ2_1: Q2.1 RT1.1@70.612,47.244 T1.1 | length 10.7
  Top Layer w0.3: T1.1 70.612,47.244 72.009,47.244 75.057,44.196 Q2.1
NetQ2_2: Q2.2 RQ2.1 SW1.2 | length 16.7
  Top Layer w0.4: Q2.2 77.597,45.212 RQ2.1 83.396,47.117 SW1.2@86.36,50.081
NetRf1_1: Rf1.1 Rf2.2 | length 7.7
  Bottom Layer w0.254: Rf2.2 175.577,40.45 175.577,47.942 Rf1.1
NetRT1_1: RT1.1@66.929,53.71 T1.2 | length 3.8
  Top Layer w0.254: RT1.1@67.31,53.71 67.321,53.721 T1.2@71.12,53.721
PB4: PIN16B.11 RT1.2@66.929,55.51 U2.28 | length 22.6
  Top Layer w0.254: PIN16B.11 59.563,60.325 60.09,59.798 60.09,52.823 U2.28 ; v2(65.278,55.499) 67.299,55.499 67.31,55.51 67.318,55.51 67.691,55.883
  Bottom Layer w0.254: v2(60.062,52.823) 60.134,52.895 60.896,52.895 63.5,55.499 v2(65.278,55.499)
rst: Crst.1 PIN16B.0 Rrst.1 SW_rst.3 SW_rst.4 U2.6 | length 45.5
  Top Layer w0.254: Crst.1 33.52,47.644 Rrst.1 33.549,47.657 SW_rst.3 ; PIN16B.0 31.623,61.341 35.547,57.417 41.77,57.417 44.958,54.229 44.958,49.737 SW_rst.4 46.45,47.657 v2(50.038,44.069) ; v2@53.213,43.942 v2(53.248,43.977) 53.283,44.012 U2.6
  Bottom Layer w0.254: v2(50.038,44.069) 50.13,43.977 v2(53.248,43.977)
pads on no net: Designator3.0 Designator3.1 PIN16B.1 PIN16B.2 SW1.1 SW1.MH1 SW1.MH2 TR.1 TR.2 TR.6 TR.8 TR.9 TR.10 TR.11

## Polygon pours and split planes (outlines as drawn)
GND on Top Layer "GND_L01_P001" (solid, pour order 1): 25.908,29.337 90.424,29.337 90.424,58.293 25.908,58.293
GND on Bottom Layer "GND_L02_P000" (solid, pour order 0): 25.908,29.464 26.035,29.337 90.424,29.337 90.424,57.531 90.424,58.293 26.035,58.293 25.908,57.531 25.908,29.337

## Silkscreen, mask and mechanical layers (free items; w line width, h text height)
Mechanical 1:
  the board outline again, w0.254

## Dimensions
189.357,40.386 to 189.357,30.353 on Bottom Layer